# Altium PCB leddriver.PcbDoc
Units mm, origin at the board's own origin, x right, y up, seen from the top; angles counter-clockwise.
Board outline 133.49 x 91.8 mm, 2 copper layers (Top Layer, Bottom Layer), stack 1.58 mm thick; 91 components, 61 nets, 320 pads, 24 vias.
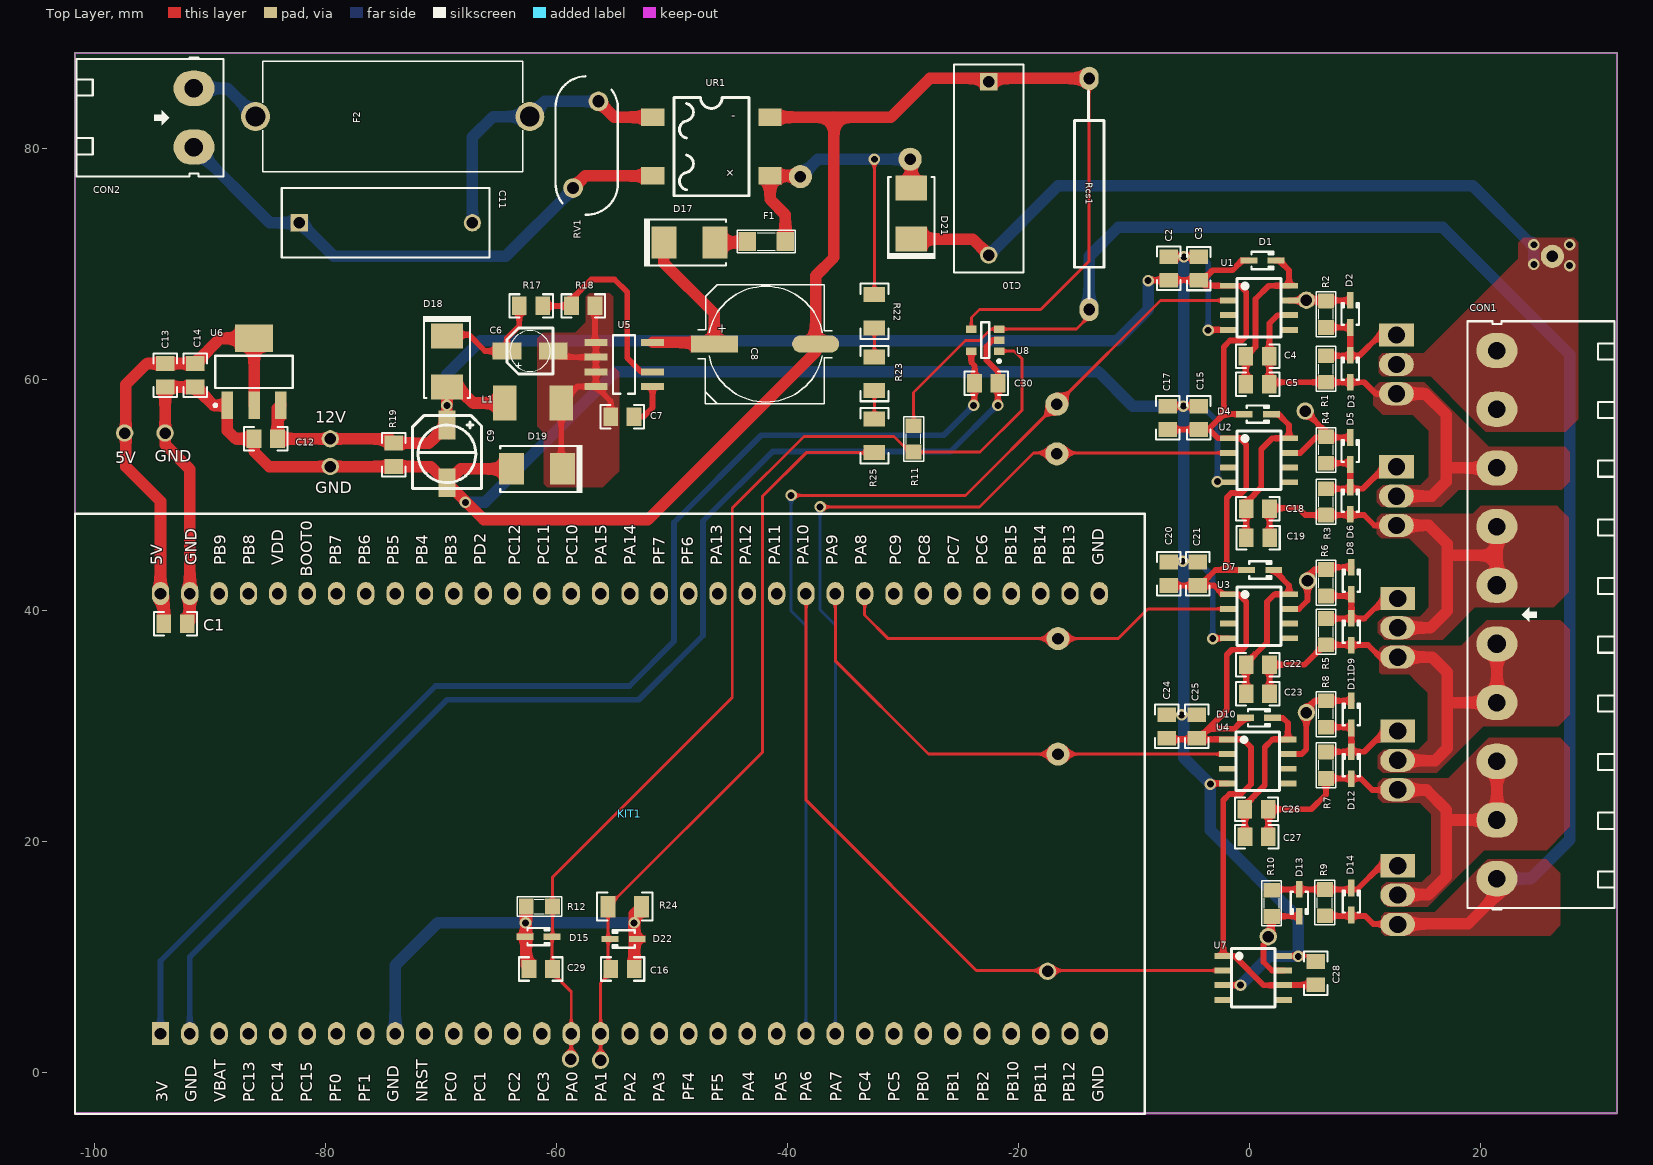
[diagram p0: Top Layer view]
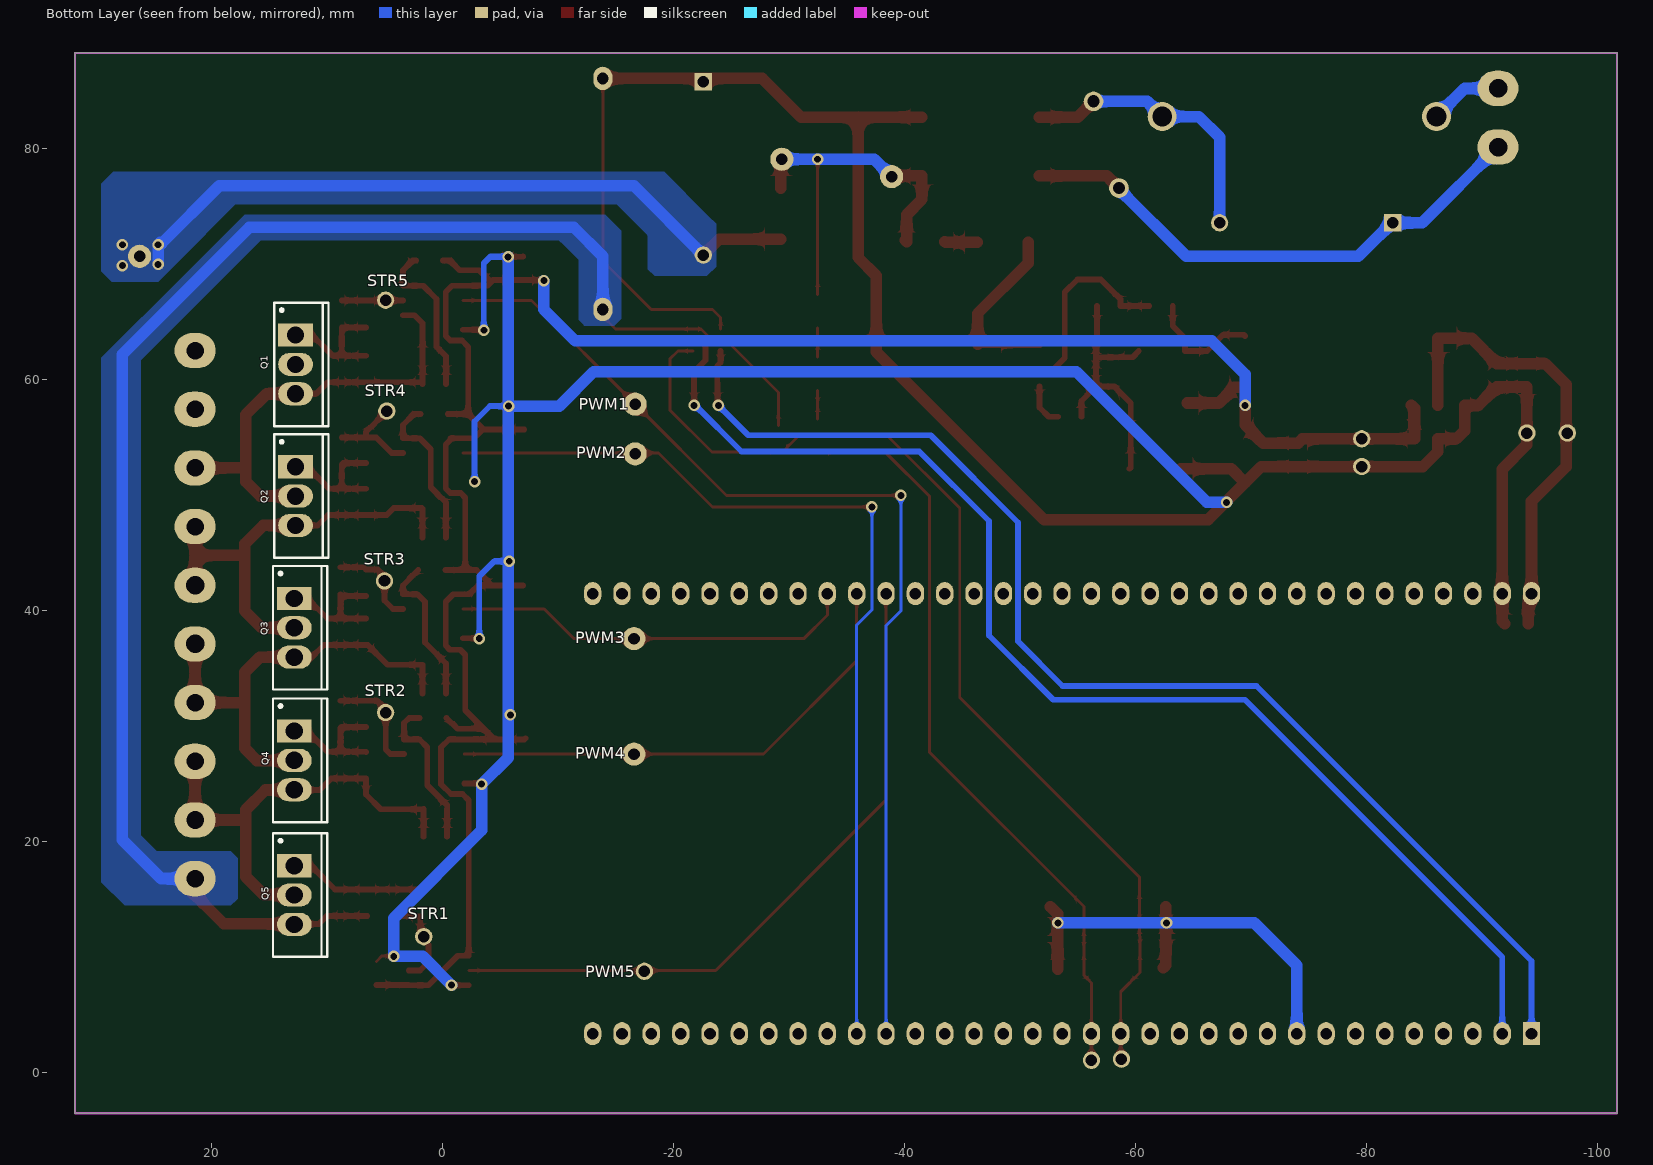
[diagram p1: Bottom Layer view, seen from below]

## Layer stack, top to bottom
Top Solder: solder mask 0.0102, Solder Resist, Dk 3.5
Top Layer: signal copper 0.0356
Dielectric 1: dielectric 1.5086, FR-4, Dk 4.8
Bottom Layer: signal copper 0.0356
Bottom Solder: solder mask 0.0102, Solder Resist, Dk 3.5

## Board outline
-101.7,-3.5 31.794,-3.5 31.794,88.3 -101.7,88.3

## Design rules (kind name [scope] priority, off if disabled: settings)
Clearance Clearance_1 [InNet('GND')] p1: gap=0.254
Clearance cutout [IsRegion] p2: gap=0.2
Clearance keepout [OnLayer('Keep-Out Layer')] p3: gap=0.2
Clearance [All] p4: gap=0.254
HoleSize [All] p1: absolutevalues=TRUE maxlimit=5 minlimit=0.01 maxpercent=80.000 minpercent=20.000
MinimumSolderMaskSliver [All] p1: minsoldermaskwidth=0.01
PolygonConnect [All] p1: connectstyle=Direct reliefconductorwidth=0.254 reliefentries=4 polygonreliefangle="90 Angle" airgapwidth=0.254
RoutingVias [All] p1: holewidth=0.3 width=0.6 viastyle="Through Hole" minholewidth=0.3 minwidth=0.6 maxholewidth=5 maxwidth=5
SilkToSilkClearance [All] p1: silktosilkclearance=0.1
SilkToSolderMaskClearance [IsPad] p1: minsilkscreentomaskgap=0.01 clearancetoexposedcopper=TRUE
SolderMaskExpansion [All] p1: expansion=0.102
Width [All] p1: maxlimit=5 minlimit=0.254 preferedwidth=0.254
26 further rules are at their usual default settings.

## Components (designator, comment, footprint, x,y, rotation, side; value= is the part's Value field where it differs from the comment)
C1 "104" 0805_HV -93,38.9 r180 top
C2 "106" 0805_HV -7,69.656 r270 top
C3 "104" 0805_HV -4.4,69.64 r270 top
C4 "106" 0805_HV 0.684,62.04 r180 top
C5 "104" 0805_HV 0.684,59.64 r180 top
C6 "10uF" TU_NHOM_10uF_MH -62.3,62.5 r270 top
C7 "104" 0805_HV -54.316,56.8 r0 top
C8 "400AX6R8M8x11" CAP-PANACAP-G-GENERIC -41.9,63.1 r0 top
C9 "220uF" TU_NHOM_2.5_MH -69.5,53.6 r0 top
C10 "B32922C3334M189" B32922_12mm -22.6,78.3 r270 top
C11 "B32922C3334M189" B32922_12mm -74.8,73.6 r0 top
C12 "105" 0805_HV -85.184,54.9 r0 top
C13 "105" 0805_HV -93.9,60.4 r90 top
C14 "105" 0805_HV -91.3,60.4 r90 top
C15 "106" 0805_HV -4.4,56.716 r270 top
C16 "104" 0805_HV -54.3,9 r180 top
C17 "104" 0805_HV -7.1,56.716 r270 top
C18 "106" 0805_HV 0.7,48.84 r180 top
C19 "104" 0805_HV 0.716,46.34 r180 top
C20 "106" 0805_HV -7,43.216 r270 top
C21 "104" 0805_HV -4.5,43.216 r270 top
C22 "106" 0805_HV 0.7,35.34 r180 top
C23 "104" 0805_HV 0.7,32.84 r180 top
C24 "106" 0805_HV -7.2,30 r270 top
C25 "104" 0805_HV -4.6,30 r270 top
C26 "106" 0805_HV 0.584,22.84 r180 top
C27 "104" 0805_HV 0.6,20.44 r180 top
C28 "104" 0805_HV 5.7,8.64 r270 top
C29 "104" 0805_HV -61.384,9 r0 top
C30 "104" 0805_HV -22.816,59.7 r180 top
CON1 "CON 10 EDG 5.08_MH" "Con 10 EDG 5.08" 21.4,39.68 r90 top
CON2 "CON 2 EDG 5.08_MH" "CON 2 EDG 5.08" -91.4,82.7 r270 top
D1 "BAT54HT1G" SOD-323 1.1,70.34 r180 top
D2 "BAT54HT1G" SOD-323 8.7,65.715 r270 top
D3 "15V" SOD-323 8.7,60.965 r270 top
D4 "BAT54HT1G" SOD-323 0.7,57.04 r180 top
D5 "BAT54HT1G" SOD-323 8.7,53.84 r270 top
D6 "15V" SOD-323 8.7,49.54 r270 top
D7 "BAT54HT1G" SOD-323 0.9,43.54 r180 top
D8 "BAT54HT1G" SOD-323 8.8,42.615 r270 top
D9 "15V" SOD-323 8.8,38.2 r270 top
D10 "BAT54HT1G" SOD-323 0.8,30.74 r180 top
D11 "BAT54HT1G" SOD-323 8.8,31.04 r270 top
D12 "15V" SOD-323 8.8,26.64 r270 top
D13 "BAT54HT1G" SOD-323 4.3,14.74 r90 top
D14 "15V" SOD-323 8.8,14.84 r270 top
D15 "3.3V" SOD-323 -61.575,11.8 r180 top
D17 "US1M-13-F" SMB -48.51,71.9 r180 top
D18 "US1M-13-F" SMB -69.5,61.59 r90 top
D19 "US1M-13-F" SMB -61.71,52.3 r0 top
D21 "US1M-13-F" SMB -29.3,74.4 r270 top
D22 "3.3V" SOD-323 -54.2,11.6 r0 top
F1 "FUSE_AUTO_0.5A 8V 1206_MH" "FUSE 1206" -41.8,72 r180 top
F2 "37015000430" "Fuse 5x20" -74.2,82.8 r180 top
KIT1 "STM32discovery" STM32discovery_kit -53.66,22.45 r0 top locked
L1 "680uF" "Inductor 4.5x5" -61.8,58.1 r0 top
Q1 "IPA60R330P" TO-220AB_NH 12.7,61.34 r270 bottom
Q2 "IPA60R330P" TO-220AB_NH 12.7,49.94 r270 bottom
Q3 "IPA60R330P" TO-220AB_NH 12.8,38.54 r270 bottom
Q4 "IPA60R330P" TO-220AB_NH 12.8,27.06 r270 bottom
Q5 "IPA60R330P" TO-220AB_NH 12.8,15.4 r270 bottom
R1 "10k" "Tro SMD 0805" 6.6,60.94 r270 top
R2 "10" "Tro SMD 0805" 6.6,65.683 r90 top
R3 "10k" "Tro SMD 0805" 6.6,49.44 r270 top
R4 "10" "Tro SMD 0805" 6.6,53.94 r90 top
R5 "10k" "Tro SMD 0805" 6.6,38.2 r270 top
R6 "10" "Tro SMD 0805" 6.6,42.44 r90 top
R7 "10k" "Tro SMD 0805" 6.6,26.64 r270 top
R8 "10" "Tro SMD 0805" 6.6,31.083 r90 top
R9 "10k" "Tro SMD 0805" 6.5,14.74 r270 top
R10 "10" "Tro SMD 0805" 1.9,14.683 r270 top
R11 "10k" "Tro SMD 0805" -29.1,54.9 r90 top
R12 "100k" "Tro SMD 0805" -61.5,14.4 r180 top
R17 "13k" 0805_HV -62.216,66.4 r180 top
R18 "2K" 0805_HV -57.7,66.4 r180 top
R19 "3k3" 0805_HV -74.1,53.516 r90 top
R22 "1M" 1206 -32.5,65.95 r270 top
R23 "100K" 1206 -32.5,60.55 r90 top
R24 "100K" 1206 -54.1,14.4 r180 top
R25 "1M" 1206 -32.5,55.15 r270 top
Rcs1 "10R" TRO_VACH_2W -13.9,76.1 r270 top
RV1 "S10K275E2" VAR_S10K275E2 -57.4,80.3 r270 top
U1 "FAN73611MX" "SOP 8" 0.8,66.24 r270 top
U2 "FAN73611MX" "SOP 8" 0.8,53.04 r270 top
U3 "FAN73611MX" "SOP 8" 0.8,39.54 r270 top
U4 "FAN73611MX" "SOP 8" 0.696,26.975 r270 top
U5 "LNK306" "SOP 7" -51.7,59.43 r180 top
U6 "AMS1117-3.3V SOT223 _MH" SOT223 -86.2,60.7 r0 top
U7 "PM8834TR" "SOP 8" 0.303,8.235 r270 top
U8 "INA180" SOT23-5AL -22.9,63.45 r180 top
UR1 "DB207S" DB207S -46.6,80.2 r270 top

## Footprints (in the part's own frame and the unit in brackets; to place one, negate y for a bottom-side part, rotate by r counter-clockwise, add the part's x,y. Pads: shape width x height; smd on the part's side, far side on the other; paste and mask are expansions set on the pad)
0805_HV [mil] "0805 with 30mil clearance between pads"
  rect 50x63 smd: 1(-40,0) 2(40,0)
  silkscreen extent -74,-40 74,40, body extent -43,-29 43,29, height 57
1206 [mm] "1206 from SM-752 data"
  rect 1.3x1.85 smd: 1(1.45,0) 2(-1.45,0)
  silkscreen extent -2.4,-1.21 2.4,1.21, body extent -1.7,-0.9 1.7,0.9, height 1.35
B32922_12mm [mm] "Epcos film capacitors, 15mm spacing"
  rect 1.5x1.5 hole 0.991: 1(-7.5,0)
  round 1.5 hole 0.991: 2(7.5,0)
  silkscreen extent -9,-3 9,3, body extent -9,-3 9,3, height 12
CAP-PANACAP-G-GENERIC [mil] "0805 with 30mil clearance between pads"
  rect 160x59.06 smd: 1(-175,0)
  oval 160x59.06 smd: 2(170,0)
  silkscreen extent -231,-203 227,203, body extent -233,-203 223,203, height 402
"CON 2 EDG 5.08" [mil]
  oval 120x140 hole 62.99: 1(-100,0) 2(100,0)
  silkscreen extent -205,-400 200,100, body extent -197,-399 197,73, height 334
"Con 10 EDG 5.08" [mil]
  oval 120x140 hole 60: 1(-900,0) 2(-700,0) 3(-500,0) 4(-300,0) 7(300,0) 8(500,0) 9(700,0) 10(900,0)
  oval 120x140 hole 62.99: 5(-100,0) 6(100,0)
  silkscreen extent -1005,-400 1000,100, body extent -996,-402 997,70, height 334
DB207S [mm]
  rect 1.5x2 smd: 1(-2.54,-5.08) 2(2.54,-5.08) 3(2.54,5.08) 4(-2.54,5.08)
  silkscreen extent -4.25,-3.25 4.26,3.25, body extent -4.4,-4.98 4.4,4.98, height 3.02
"Fuse 5x20" [mm] "Epcos film capacitors, 15mm spacing"
  round 2.5 hole 1.7: 1(-11.875,0) 2(11.875,0)
  silkscreen extent -11.25,-4.8 11.25,4.8, body extent -12.14,-4.46 12.11,4.54, height 13.94
"FUSE 1206" [mil]
  rect 60x65 smd: 1(-63,0.94) 2(67,0.94)
  silkscreen extent -97,-37 101,40, body extent -63,-33 63,33, height 22
"Inductor 4.5x5" [mm]
  rect 2x3 smd: 1(2.2,-0.1) 2(-2.7,-0.1)
  body extent -2.6,-2.6 2.2,2.2, height 2
SMB [mm] "Molded Diode, 2-Leads, Body 5.4x3.6mm, IPC Medium Density, based on OnSemi component dimensions"
  rect 2.159x2.743 smd: 1(2.21,0) 2(-2.21,0)
  silkscreen extent -3.18,-2.08 3.94,2.08, body extent -2.7,-1.8 2.7,1.8, height 2.32
SOD-323 [mm] "SOD-323/SC-76; 2 Leads; Body 1.7 x 1.3 mm, (LxW)"
  rect 1.45x0.55 smd: 1(-1.175,0) 2(1.175,0)
  silkscreen extent -0.95,-0.75 0.95,0.75
"SOP 7" [mm] "LQFP64"
  rect 2x0.6 smd: 1(0,0) 2(0,-1.27) 4(0,-3.81) 5(4.9,-3.81) 6(4.9,-2.54) 7(4.9,-1.27) 8(4.9,0)
  silkscreen extent 1.52,-4.44 3.43,0.64, body extent -0.66,-4.38 5.39,0.52, height 1.36
"SOP 8" [mil] "LQFP64"
  rect 20x60 smd: 1(-75,-102.5) 2(-25,-102.5) 3(25,-102.5) 4(75,-102.5) 5(75,102.5) 6(25,102.5) 7(-25,102.5) 8(-75,102.5)
  silkscreen extent -100,-75 100,75, body extent -98,-120 100,117, height 63
SOT23-5AL [mm] "SOT23, 5-Leads, Body 2.9x1.6mm, Pitch 0.95mm, Lead Span 2.8mm, IPC High Density"
  rect 0.9x0.65 smd: 1(-1.2,0.95) 2(-1.2,0) 3(-1.2,-0.95) 4(1.2,-0.95) 5(1.2,0.95)
  silkscreen extent -1.33,-1.55 0.35,1.95, body extent -0.9,-1.55 0.9,1.55, height 1.45
SOT223 [mm]
  rect 1x2.4 smd: 1(-2.3,-2.9) 2(0,-2.9) 3(2.3,-2.9)
  rect 3.3x2.4 smd: 4(0,2.9)
  silkscreen extent -3.47,-3.02 3.35,1.4, body extent -3.25,-3.56 3.25,3.4, height 1.68
STM32discovery_kit [mm]
  rect 1.5x2 hole 1 paste+0: 1(-40.64,-19.05)
  oval 1.5x2 hole 1 paste+0: 2(-38.1,-19.05) 3(-35.56,-19.05) 4(-33.02,-19.05) 5(-30.48,-19.05) 6(-27.94,-19.05) 7(-25.4,-19.05) 8(-22.86,-19.05) 9(-20.32,-19.05) 10(-17.78,-19.05) 11(-15.24,-19.05) 12(-12.7,-19.05) 13(-10.16,-19.05) 14(-7.62,-19.05) 15(-5.08,-19.05) 16(-2.54,-19.05) 17(0,-19.05) 18(2.54,-19.05) 19(5.08,-19.05) 20(7.62,-19.05) 21(10.16,-19.05) 22(12.7,-19.05) 23(15.24,-19.05) 24(17.78,-19.05) 25(20.32,-19.05) 26(22.86,-19.05) 27(25.4,-19.05) 28(27.94,-19.05) 29(30.48,-19.05) 30(33.02,-19.05) 31(35.56,-19.05) 32(38.1,-19.05) 33(40.64,-19.05) 34(40.64,19.05) 35(38.1,19.05) 36(35.56,19.05) 37(33.02,19.05) 38(30.48,19.05) 39(27.94,19.05) 40(25.4,19.05) 41(22.86,19.05) 42(20.32,19.05) 43(17.78,19.05) 44(15.24,19.05) 45(12.7,19.05) 46(10.16,19.05) 47(7.62,19.05) 48(5.08,19.05) 49(2.54,19.05) 50(0,19.05) 51(-2.54,19.05) 52(-5.08,19.05) 53(-7.62,19.05) 54(-10.16,19.05) 55(-12.7,19.05) 56(-15.24,19.05) 57(-17.78,19.05) 58(-20.32,19.05) 59(-22.86,19.05) 60(-25.4,19.05) 61(-27.94,19.05) 62(-30.48,19.05) 63(-33.02,19.05) 64(-35.56,19.05) 65(-38.1,19.05) 66(-40.64,19.05)
  silkscreen extent -48.04,-26 44.56,25.95
TO-220AB_NH [mm] "TO, Thru-Hole, Vertical, Heatsink Mounted; 3 In-Line Leads; Pitch 2.54 mm"
  rect 2x3 hole 1.5 paste+0: 1(-2.54,0)
  oval 2x3 hole 1.5 paste+0: 2(0,0) 3(2.54,0)
  silkscreen extent -5.35,-1.85 5.35,2.85, body extent -5.08,-1.57 5.08,3, height 20.54
"Tro SMD 0805" [mil]
  rect 50x55 smd: 1(-45,0) 2(45,0)
  silkscreen extent -77,-34 76,33, body extent -62,-28 56,27, height 21
TRO_VACH_2W [mil]
  oval 80x65 hole 40: 1(-393.7,0) 2(393.7,0)
  silkscreen extent -351,-50 354,50, body extent -414,-110 414,107, height 217
TU_NHOM_2.5_MH [mm] "0805 with 30mil clearance between pads"
  rect 1.5x2.5 smd: 1(0,2.5) 2(0,-2.5)
  silkscreen extent -3,-3 3,3.3, body extent -3.3,-3.5 3.3,3.5, height 8.11
TU_NHOM_10uF_MH [mm] "0805 with 30mil clearance between pads"
  rect 1.5x2.5 smd: 1(0,-2) 2(0,2)
  silkscreen extent -2,-2 2,2, body extent -2.15,-2.5 2.15,2.5, height 5.4
VAR_S10K275E2 [mm] "EPCOS"
  round 1.7 hole 1.067: 1(-3.81,1.016) 2(3.69,-1.184)
  silkscreen extent -6,-2.7 6,2.7, body extent -5.98,-2.7 5.98,2.7, height 14.99

## Part data
C1 C2 C3 C4 C5 C7 C12 C13 C14 C15 C16 C17 C18 C19 C20 C21 C22 C23 C24 C25 C26 C27 C28 C29 C30: library part CM, "Cap SMD"
C6: library part TU_NHOM_10uF_25V_MH, "TU_NHOM_10uF_25V_MH"
C8: "CAP, AL, 6.8uF, 400V, +/-20%, TH"
C9: library part TU_NHOM_220uF_25V_MH, "TU_NHOM_220uF_25V_MH"
C10 C11: library part BFC233620154, "CAP FILM 0.33UF 630VDC RADIAL"
CON1: "CON 10 EDG 5.08 (xanh cong)"
CON2: "CON 2 EDG 5.08 (xanh cong)"
D1 D2 D3 D4 D5 D6 D7 D8 D9 D10 D11 D12 D13 D14 D15 D22: library part MMDL914-TP, "Diode, Switching, 100 V, 0.2 A, SOD-323"
D17 D18 D19 D21: library part MURS160-13-F, "Diode, Ultrafast, 600V, 1A, SMB"
F1: "Fuse"
F2: library part 0216008.MXESPP, "FUSE BOARD MOUNT 5A 250VAC RAD"
KIT1: library part STM32Discovery_kit
L1: library part "Inductor 4.5x5_MH"
Q1 Q2 Q3 Q4 Q5: library part IPP60R190P6, "MOSFET N-CH 600V 10.6A TO220"
R1 R2 R3 R4 R5 R6 R7 R8 R9 R10 R11 R12 R22 R23 R24 R25: library part "R nho", "RES, 100, 1%, 0.1 W, 0402"
R17 R18 R19: library part R, "Resistor 1/4W"
Rcs1: library part TRO_CS_2W_MH
RV1: "Varistor 275V RMS 10MM Radial, TH"
U5: library part Component_1
U8: "Micropower Quad CMOS Voltage Comparator"

## Free pads (board coordinates)
  round 2 hole 1 paste+0: 0(-16.7,57.9) 0(26.2,70.7) 1(-38.9,77.6) 1(-16.7,53.6) 2(-29.4,79.1) 2(-16.6,37.6) 3(-16.6,27.6)
  round 1.5 hole 1 paste+0: 4(4.9,66.9) 5(4.8,57.3) 6(5,42.6) 7(4.9,31.2) 8(1.6,11.8) 9(-58.8,1.2) 10(-56.2,1.1) 11(-79.6,54.9) 12(-79.6,52.5) 13(-97.4,55.4) 14(-93.9,55.4) 15(-17.5,8.8)

## Via types
v1: diameter 1, hole 0.6, Top Layer to Bottom Layer, tented both sides, 24 vias

## Nets (pads, with @x,y where several pads share a name; then routed paths per layer and width w, separated by ;. In a path a pad name is that pad's centre, name@x,y a point inside that pad or via, vN(x,y) a via of type N, cw(c..) or ccw(c..) an arc to the next point about the centre after c; other vN are vias at no path point)
3.3V: C30.2 KIT1.1 U8.5 | length 107.5
  Top Layer w0.5: U8.5 -24.1,61.5 -23.8,61.2 -23.8,59.732 C30.2 -23.832,57.868 v1(-23.9,57.8)
  Bottom Layer w0.5: KIT1.1 -94.3,9.7 -70.5,33.5 -53.7,33.5 -49.834,37.366 -49.834,47.666 -42.3,55.2 -26.5,55.2 v1(-23.9,57.8)
5V: C1.2 C13.2 C14.2 KIT1.66 pad.13 U6.2 U6.4 | length 40.6
  Top Layer w1: C1.2 -94.016,41.216 KIT1.66 -94.3,49.5 -97.3,52.5 -97.3,59.6 -95.484,61.416 C13.2 C14.2 -89.116,63.6 U6.4 U6.2
12V: C2.2 C3.2 C9.1 C12.2 C15.2 C17.2 C20.2 C21.2 C24.2 C25.2 C28.2 D1.2 D4.2 D7.2 D10.2 D18.2 L1.2 pad.11 R19.2 U1.1 U2.1 U3.1 U4.1 U6.3 U7.1 U7.6 | length 213.7
  Top Layer w0.5: C12.2 -83.9,55.168 U6.3 ; v1(-8.8,68.6) -8.76,68.64 C2.2 -4.416,68.64 C3.2 ; C24.2 -7.096,28.88 U4.1 -0.58,28.88 0.1,28.2 0.1,25 -0.756,24.144 -1.756,24.144 -2.3,23.6 U7.1 -1.34,10.14 1.2,7.6 U7.6 2.931,7.624 C28.2 ; C17.2 C15.2 C15.2@-3.6,55.7 ; C20.2 C21.2 C21.2@-4.3,42.2 ; C25.2 -4.416,28.984 -3.6,29.8 ; D4.2 -2.26,57.04 ; D10.2 -1.315,29.8 -3.6,29.8 ; D7.2 -2,43.54 ; D1.2 -0.66,70.34 -1.5,69.5 -3.2,69.5 -4.076,68.624 C3.2 ; C3.2 -3.921,68.145 U1.1 -0.845,68.145 -0.3,67.6 -0.3,63.8 -0.7,63.4 -1.7,63.4 -2.26,62.84 -2.26,57.04 ; C21.2@-4.3,42.2 -2.96,43.54 -2,43.54 ; C21.2@-4.3,42.2 -3.1,42.2 -2.345,41.445 U3.1 -0.945,41.445 -0.3,40.8 -0.3,37 -0.656,36.644 -1.556,36.644 -2,36.2 -2,31.4 -3.6,29.8 ; C15.2@-3.6,55.7 -2.26,57.04 ; C15.2@-3.6,55.7 -3.5,55.7 -2.745,54.945 U2.1 -0.745,54.945 -0.7,54.9 -0.7,54.8 -0.3,54.4 -0.3,50.6 -0.7,50.2 -1.6,50.2 -2,49.8 -2,43.54
  Top Layer w1: U6.3 -84.168,57.532 C12.2 -74.468,54.9 R19.2 -71.068,54.532 C9.1 v1(-69.5,57.8) D18.2 -68.58,59.38 -67.2,58 L1.2
  Bottom Layer w1: v1(-69.5,57.8) -69.5,60.5 -66.6,63.4 -11.5,63.4 -8.8,66.1 v1(-8.8,68.6)
+VDC: C10.2 CON1.9 CON1.10 D21.1 pad.0@26.2,70.7 Q1.2 | length 60.9
  Top Layer w1: D21.1 -23.99,72.19 C10.2
  Bottom Layer w1: C10.2 -16.6,76.8 19.3,76.8 24.3,71.8 24.4,71.9 v1(24.6,71.7) v1(24.6,70)
  other v1: 27.7,69.9 27.7,71.7
+VDC1: C8.1 D17.1 U5.4 | length 16
  Top Layer w1: U5.4 -46.485,63.24 C8.1 -46.345,65.745 -50.72,70.12 D17.1
BP: C7.2 U5.1 | length 3.8
  Top Layer w0.5: C7.2 -52.5,56.8 -51.7,57.6 U5.1
CS: CON1.1 D14.2 Q5.3 R9.2 R11.2 Rcs1.2 U8.3 | length 140.5
  Top Layer w0.254: R11.2 -29.1,58.9 -24.6,63.4 -23.4,63.4 -22.4,64.4 U8.3 -15,64.4 -13.9,65.5 Rcs1.2
  Top Layer w0.5: R9.2 10.003,13.597 10.7,12.9 Q5.3@13,12.9
  Top Layer w1: Q5.3@13,12.9 18.9,12.9 21.4,15.4 CON1.1
  Bottom Layer w1: Rcs1.2 -13.9,70.7 -11.4,73.2 16.7,73.2 27.7,62.2 27.7,20.2 24.32,16.82 CON1.1
FB: R17.1 R18.2 U5.2 | length 17.4
  Top Layer w0.5: R17.1 R18.2 -58.716,66.984 -57,68.7 -55,68.7 -53.9,67.6 -53.9,61.9 -52.7,60.7 U5.2
GND: C1.1 C2.1 C3.1 C8.2 C9.2 C10.1 C12.1 C13.1 C14.1 C15.1 C17.1 C20.1 C21.1 C24.1 C25.1 C28.1 D19.2 KIT1.65 pad.12 pad.14 R19.1 Rcs1.1 U1.4 U2.4 U3.4 U4.4 U6.1 U7.3 U7.8 U8.4 UR1.4 | length 380.8
  Top Layer w0.254: U8.4 -24.1,65.4 -23.4,66.1 -18.1,66.1 -13.9,70.3 Rcs1.1 ; U7.8 5.216,10.14 C28.1
  Top Layer w0.5: C17.1 v1(-5.75,57.732) C15.1 ; C2.1 -6.984,70.656 v1(-5.7,70.656) C3.1 ; v1(-3.6,64.3) -3.565,64.335 U1.4 ; v1(-3.4,25) -3.33,25.07 U4.4 ; v1(-3.2,37.6) -3.165,37.635 U3.4 ; U7.3 v1(-0.8,7.6)
  Top Layer w1: C1.1 -91.76,39.124 KIT1.65 -91.76,52.26 -93.9,54.4 C13.1 C14.1 -89.716,57.8 U6.1 -88.5,55.6 -87.8,54.9 C12.1 -86.2,53.8 -84.9,52.5 pad.12 R19.1 -70.9,52.5 C9.2 ; D19.2 -68.3,52.3 C9.2 ; UR1.4 -36,82.74 ; Rcs1.1@-14,86.1 -27.7,86.1 -31.06,82.74 -36,82.74 ; C9.2 -66.3,47.9 -52.1,47.9 -37.582,62.418 C8.2 -37.582,69.018 -36,70.6 -36,82.74
  Bottom Layer w0.5: v1(-5.9,31) -5.9,44.2 v1(-5.8,44.3) v1@-5.8,57.682 ; v1@-5.7,44.3 -4.5,44.3 -3.2,43 v1(-3.2,37.6) ; v1@-5.7,57.732 -4.132,57.732 -2.8,56.4 v1(-2.8,51.2) ; v1(-5.7,70.656) -4.244,70.656 -4.2,70.7 -3.6,70.1 v1(-3.6,64.3)
  Bottom Layer w1: v1(-67.9,49.4) -66.2,49.4 -54.9,60.7 -13.1,60.7 -10.132,57.732 v1(-5.75,57.732) ; v1(-5.7,70.656) -5.7,57.732 -5.7,44.3 -5.7,27.3 v1(-3.4,25) -3.4,21 4.2,13.4 v1(4.2,10.1) 1.7,10.1 v1(-0.8,7.6)
GND1: C16.1 C29.1 D15.2 D22.2 KIT1.9 R12.2 R24.2 | length 39.2
  Top Layer w1: R12.2 -62.643,9.327 C29.1@-62.416,9.1 ; C16.1 -53.284,13.766 R24.2
  Bottom Layer w1: KIT1.9 -73.98,9.32 -70.3,13 v1(-62.7,13) v1(-53.3,13)
GND_INA: C30.1 KIT1.2 U8.2 | length 108.8
  Top Layer w0.5: v1@-21.8,58 C30.1 -21.8,60.7 -22.8,61.7 -22.8,62.9 -22.25,63.45 U8.2
  Bottom Layer w0.5: KIT1.2 -91.76,10.04 -69.5,32.3 -52.9,32.3 -47.326,37.874 -47.326,47.774 -41.3,53.8 -25.9,53.8 -21.9,57.8 v1(-21.8,57.8)
HV1: D21.2 F1.1 pad.1@-38.9,77.6 pad.2@-29.4,79.1 R22.2 UR1.3 | length 33.4
  Top Layer w0.254: R22.2 v1(-32.5,79.1)
  Top Layer w1: F1.1@-40.076,72.1 F1.1 -40.2,74.3 -41.52,75.62 UR1.3 -38.96,77.66 pad.1@-38.9,77.6 ; pad.2@-29.4,79.1 -29.3,79 D21.2
  Bottom Layer w1: pad.1@-38.9,77.6 -37.4,79.1 v1(-32.5,79.1) pad.2@-29.4,79.1
IN0: C29.2 D15.1 KIT1.15 pad.9 R11.1 R12.1 U8.1 | length 91.3
  Top Layer w0.254: pad.9 -58.74,1.26 KIT1.15 -58.74,7.04 -60.4,8.7 D15.1 -60.357,11.843 R12.1 -60.357,16.943 -44.8,32.5 -44.8,48.9 -38.6,55.1 -30.8,55.1 -29.457,53.757 R11.1 -23.343,53.757 -19.7,57.4 -19.7,61.8 -20.4,62.5 U8.1
IN1: C16.2 D22.1 KIT1.16 pad.10 R24.1 R25.1 | length 65.9
  Top Layer w0.254: pad.10 KIT1.16 -56.2,7.8 -55.55,8.45 R24.1 -42.2,27.75 -42.2,49.9 -38.4,53.7 R25.1
LED_PWM1: KIT1.23 pad.0@-16.7,57.9 U1.2 | length 92
  Top Layer w0.254: v1(-39.7,50) -24.6,50 -16.7,57.9 -7.725,66.875 U1.2
  Bottom Layer w0.254: v1(-39.7,50) -39.7,40 -38.42,38.72 KIT1.23
LED_PWM2: KIT1.24 pad.1@-16.7,53.6 U2.2 | length 83.5
  Top Layer w0.254: v1(-37.2,49) -23.4,49 -18.725,53.675 U2.2
  Bottom Layer w0.254: v1(-37.2,49) -37.2,40.1 -35.88,38.78 KIT1.24
LED_PWM3: KIT1.42 pad.2@-16.6,37.6 U3.2 | length 35.3
  Top Layer w0.254: KIT1.42 -33.34,39.64 -31.3,37.6 -16.6,37.6 -11.4,37.6 -8.825,40.175 U3.2
LED_PWM4: KIT1.43 pad.3 U4.2 | length 43.1
  Top Layer w0.254: KIT1.43 -35.88,35.68 -27.81,27.61 U4.2
LED_PWM5: KIT1.44 pad.15 U7.2 | length 60.1
  Top Layer w0.254: KIT1.44 -38.4,41.48 -38.4,23.6 -23.67,8.87 U7.2
LED_STR2: C26.1 C27.1 CON1.2 CON1.3 D12.2 Q4.3 Q5.2 R7.2 | length 40.8
  Top Layer w0.5: C26.1 C26.1@1.616,22.824 ; C27.1 C26.1@1.616,22.824 ; Q4.3@12.9,24.5 10.6,24.5 9.603,25.497 R7.2 6.6,24.1 5.324,22.824 C26.1@1.616,22.824
  Top Layer w1: Q4.3@12.9,24.5 15.3,24.5 17,22.8 17,21.9 ; Q5.2@13,15.44 15.44,15.44 17,17 17,21.9 ; CON1.3 CON1.2 17,21.9
LED_STR3: C22.1 C23.1 CON1.4 CON1.5 D9.2 Q3.3 Q4.2 R5.2 | length 40.2
  Top Layer w0.5: C23.1 C22.1 4.74,35.34 6.457,37.057 R5.2 10.243,37.057 11.3,36 Q3.3
  Top Layer w1: Q3.3 15.8,36 17.1,34.7 17.1,32 ; Q4.2@12.9,27.04 16.04,27.04 17.1,28.1 17.1,32 ; CON1.5 CON1.4 17.16,32.06 17.1,32
LED_STR4: C18.1 C19.1 CON1.6 CON1.7 D6.2 Q2.3 Q3.2 R3.2 | length 39.4
  Top Layer w0.5: C19.1 1.716,46.356 C18.1 1.776,48.9 4.2,48.9 4.803,48.297 R3.2 6.603,48.3 9.9,48.3 10.8,47.4 Q2.3
  Top Layer w1: Q2.3 15.5,47.4 17.1,45.8 17.1,44.6 ; Q3.2 15.64,38.54 17.1,40 17.1,44.6 ; CON1.6 21.4,44.8 ; CON1.7 21.4,44.8 ; 17.1,44.6 17.3,44.8 21.4,44.8
LED_STR5: C4.1 C5.1 CON1.8 D3.2 Q1.3 Q2.2 R1.2 U1.6 | length 38.9
  Top Layer w0.5: U1.6 2.405,65.605 1.7,64.9 C4.1 C5.1 1.857,59.797 R1.2 9.903,59.797 10.9,58.8 Q1.3
  Top Layer w1: Q2.2 15.74,49.94 17,51.2 17,52.5 ; Q1.3 15.2,58.8 17,57 17,52.5 ; CON1.8 17.12,52.38 17,52.5
NetC4_2: C4.2 C5.2 D1.1 U1.8 | length 13.9
  Top Layer w0.5: C5.2 C4.2 0.5,62.872 0.5,67 1.645,68.145 U1.8 3.403,69.497 2.56,70.34 D1.1
NetC6_1: C6.1 D18.1 R17.2 | length 10.2
  Top Layer w0.5: D18.1 -69.4,63.9 -67.6,63.9 -66.2,62.5 C6.1 -64.3,63.6 -63.232,64.668 R17.2
NetC11_1: C11.1 CON2.2 RV1.2 UR1.2 | length 46.6
  Top Layer w1: RV1.2 -57.534,77.66 UR1.2
  Bottom Layer w1: CON2.2 -84.84,73.6 C11.1 -82.2,73.6 -79.3,70.7 -64.4,70.7 -58.584,76.516 RV1.2
NetC11_2: C11.2 F2.1 RV1.1 UR1.1 | length 24.9
  Top Layer w1: RV1.1 -55.014,82.74 UR1.1
  Bottom Layer w1: C11.2 -67.3,81 -65.5,82.8 F2.1 -61.015,84.11 RV1.1
NetC18_2: C18.2 C19.2 D4.1 U2.8 | length 14.1
  Top Layer w0.5: C19.2 -0.316,46.356 C18.2 -0.316,49.384 1,50.7 1,54 1.945,54.945 U2.8 3.404,56.096 2.46,57.04 D4.1
NetC22_2: C22.2 C23.2 D7.1 U3.8 | length 13.5
  Top Layer w0.5: C23.2 C22.2 -0.316,35.456 1.5,37.272 1.5,40.8 2.145,41.445 U3.8 3.404,42.211 D7.1
NetC26_2: C26.2 C27.2 D10.1 U4.8 | length 13.7
  Top Layer w0.5: C27.2 -0.416,22.824 C26.2 -0.432,23.168 1.3,24.9 1.3,28.2 1.98,28.88 U4.8 3.3,30.3 2.86,30.74 D10.1
NetCON2_1: CON2.1 F2.2 | length 6.3
  Bottom Layer w1: CON2.1 -88.515,85.24 F2.2
NetD2_1: D2.1 pad.4 R2.2 U1.7 | length 5.3
  Top Layer w0.5: U1.7 8.685,66.875 D2.1
NetD2_2: D2.2 D3.1 Q1.1 R1.1 R2.1 | length 11.3
  Top Layer w0.5: R1.1 9.483,62.083 11.28,63.88 Q1.1 ; R2.1 D2.2 D3.1
NetD5_1: D5.1 pad.5 R4.2 U2.7 | length 8.8
  Top Layer w0.5: U2.7 4.375,53.675 5.715,55.015 D5.1 ; pad.5 6.6,55.5 R4.2
NetD5_2: D5.2 D6.1 Q2.1 R3.1 R4.1 | length 11
  Top Layer w0.5: R3.1 9.783,50.583 11.68,52.48 Q2.1 ; R4.1 8.568,52.797 D5.2 D6.1
NetD8_1: D8.1 pad.6 R6.2 U3.7 | length 8.1
  Top Layer w0.5: U3.7 4.275,40.175 5,40.9 pad.6 5,43 5.583,43.583 R6.2 6.807,43.79 D8.1
NetD8_2: D8.2 D9.1 Q3.1 R5.1 R6.1 | length 11.2
  Top Layer w0.5: R5.1 9.943,39.343 11.68,41.08 Q3.1 ; R6.1 8.657,41.297 D8.2 D9.1
NetD11_1: D11.1 pad.7 R8.2 U4.7 | length 9.5
  Top Layer w0.5: U4.7 4.51,27.61 4.9,28 pad.7 4.9,31.5 5.626,32.226 R8.2 8.789,32.226 D11.1
NetD11_2: D11.2 D12.1 Q4.1 R7.1 R8.1 | length 11.3
  Top Layer w0.5: R7.1 6.632,27.815 D12.1 ; R8.1 8.725,29.94 D11.2 D12.1 ; Q4.1@12.9,29.58 11.68,29.58 9.915,27.815 D12.1
NetD13_1: D13.1 pad.8 R10.2 U7.7 | length 8.6
  Top Layer w0.5: U7.7 1.93,8.87 1.2,9.6 1.2,11.1 1.9,11.8 R10.2 1.925,13.565 D13.1
NetD13_2: D13.2 D14.1 Q5.1 R9.1 R10.1 | length 12
  Top Layer w0.5: R10.1 1.957,15.883 R9.1 9.283,15.883 11.38,17.98 Q5.1@13,17.98
NetD17_2: D17.2 F1.2 | length 2.8
  Top Layer w1: D17.2 -43.578,71.9 F1.2
NetR22_1: R22.1 R23.1 | length 2.5
  Top Layer w0.254: R23.1 R22.1
NetR23_2: R23.2 R25.2 | length 2.5
  Top Layer w0.254: R25.2 R23.2
PA11: KIT1.45
PB0: KIT1.27
PB1: KIT1.28
PB3: KIT1.56
PB8: KIT1.63
PB9: KIT1.64
PB13: KIT1.35
PB14: KIT1.36
PB15: KIT1.37
PC13O: KIT1.4
PC14O: KIT1.5
PC15O: KIT1.6
PF0O: KIT1.7
PF1O: KIT1.8
PF4O: KIT1.19
PF5O: KIT1.20
S: C6.2 C7.1 D19.1 L1.1 R18.1 U5.5 U5.6 U5.7 U5.8 | length 23.4
  Top Layer w0.5: C6.2 -59.77,61.97 U5.6 ; D19.1 -59.6,52.4 L1.1 -58.17,59.43 U5.8 ; R18.1 -56.684,63.324 U5.5 U5.6 ; C7.1 -55.332,58.162 U5.8 ; U5.8 U5.7 U5.6
pads on no net: KIT1.3 KIT1.10 KIT1.11 KIT1.12 KIT1.13 KIT1.14 KIT1.17 KIT1.18 KIT1.21 KIT1.22 KIT1.25 KIT1.26 KIT1.29 KIT1.30 KIT1.31 KIT1.32 KIT1.33 KIT1.34 KIT1.38 KIT1.39 KIT1.40 KIT1.41 KIT1.46 KIT1.47 KIT1.48 KIT1.49 KIT1.50 KIT1.51 KIT1.52 KIT1.53 KIT1.54 KIT1.55 KIT1.57 KIT1.58 KIT1.59 KIT1.60 KIT1.61 KIT1.62 U1.3 U1.5 U2.3 U2.5 U2.6 U3.3 U3.5 U3.6 U4.3 U4.5 U4.6 U7.4 U7.5

## Polygon pours and split planes (outlines as drawn)
S on Top Layer "Bottom Layer-No Net" (solid, pour order 20): -57.5,67.2 -57.5,65.6 -57.5,65 -58.1,64.4 -58.4,64.1 -60.6,64.1 -61.2,64.1 -61.7,63.6 -61.7,62.3 -61.7,56 -61.5,55.8 -61.1,55.4 -61.1,52 -61.1,51 -60.8,50.7 -58.1,50.7 -56,50.7 -55.1,51.6 -54.6,52.1 -54.6,57.4 -54.6,60.7 -54.9,61 -55.1,61.2 -55.1,63.4 -55.1,67.2 -55.4,67.5 -57.2,67.5 -57.5,67.2
CS on Top Layer "Bottom Layer-No Net" (solid, pour order 18): 13.5,13.9 12.7,13.9 11.7,13.9 11.5,13.7 11.4,13.6 11.4,13.2 11.4,12.2 11.7,11.9 13.1,11.9 26,11.9 26.9,12.8 26.9,17.1 26.9,17.3 26.2,18 25.7,18.5 21.3,18.5 20.6,18.5 19.9,17.8 16,13.9 13.6,13.9
LED_STR2 on Top Layer "Bottom Layer-No Net" (solid, pour order 16): 13.1,25.5 11.5,25.5 11.3,25.3 11.1,25.1 11.1,24.7 11.1,23.8 11.3,23.6 11.5,23.4 12.9,23.4 14.7,23.4 15.5,22.6 15.7,22.4 15.7,19.5 15.7,17.3 15.2,16.8 14.9,16.5 13,16.5 11.8,16.5 11.4,16.1 11.4,15 11.4,14.9 11.7,14.6 11.9,14.4 12.9,14.4 15.4,14.4 17.1,16.1 20.3,19.3 22.6,19.3 25.7,19.3 27.4,21 27.7,21.3 27.7,28 27.7,28.2 27.1,28.8 26.9,29 23.3,29 20.7,29 20.1,28.4 17.2,25.5 13.1,25.5
LED_STR3 on Top Layer "Bottom Layer-No Net" (solid, pour order 14): 13.3,37 11.8,37 11.5,37 11.3,36.8 11.2,36.7 11.2,36.3 11.2,34.7 11.4,34.5 12.7,34.5 13.8,34.5 14.5,33.8 15.4,32.9 15.4,29.7 15.4,28.8 14.7,28.1 14.6,28 12,28 11.6,28 11.3,27.7 11.1,27.5 11.1,26.6 11.1,26.4 11.3,26.2 11.5,26 12.9,26 16.2,26 17.6,27.4 20.2,30 22.2,30 26.7,30 27.7,31 27.7,38.3 27.7,38.4 27.1,39 26.9,39.2 22.8,39.2 20.5,39.2 19.4,38.1 18.3,37
LED_STR4 on Top Layer "Bottom Layer-No Net" (solid, pour order 12): 13,48.4 11.4,48.4 11.1,48.1 11,48 11,47.7 11,46.7 11.4,46.3 13,46.3 13.8,46.3 15.3,44.8 15.5,44.6 15.5,42.2 15.5,40.3 15,39.8 14.7,39.5 13.3,39.5 11.6,39.5 11.1,39 11.1,38.5 11.1,38.1 11.5,37.7 11.7,37.5 12.8,37.5 16.7,37.5 17.8,38.6 19.5,40.3 21.5,40.3 26.3,40.3 27.1,41.1 27.6,41.6 27.6,46.4 27.6,48.1 26.9,48.8 26.6,49.1 22.3,49.1 20,49.1 19.5,48.6 19.3,48.4
LED_STR5 on Top Layer "Bottom Layer-No Net" (solid, pour order 10): 12.5,59.8 11.2,59.8 11,59.6 10.5,59.1 10.5,59 10.7,58.8 10.7,58.1 10.7,57.8 11,57.5 11.5,57 13.2,57 14.1,57 15.2,55.9 15.5,55.6 15.5,52.4 15.5,51.6 14.9,51 14.8,50.9 13.2,50.9 11.5,50.9 11.1,50.5 11,50.4 11,49.6 11,49.4 11.2,49.2 11.4,49 13.4,49 16.6,49 17.8,50.2 18.1,50.5 22.4,50.5 27,50.5 27.7,51.2 27.7,53.6 27.7,53.8 27.3,54.2 24.6,54.2 20.7,54.2 17.4,57.5 15.1,59.8 12.4,59.8
+VDC on Top Layer "Bottom Layer-No Net" (solid, pour order 4): 11.15,62 11.45,62.3 12.85,62.3 15.05,62.3 23.227,70.477 23.227,71.86 23.667,72.3 26.55,72.3 28.05,72.3 28.45,71.9 28.45,69.3 28.45,56.6 27.35,55.5 21.75,55.5 20.45,55.5 19.15,56.8 15.65,60.3 12.05,60.3 11.45,60.3 11.15,60.6
CS on Bottom Layer "Bottom Layer-No Net" (solid, pour order 8): -15.5,65.3 -15.5,67.9 -15.5,71.2 -15.5,72.9 -14.6,73.8 -14.1,74.3 -10.2,74.3 17.1,74.3 22.4,69 29.5,61.9 29.5,56.8 29.5,47.2 29.5,16.5 27.5,14.5 18.3,14.5 17.8,15 17.7,15.1 17.7,18.6 18.3,19.2 20.7,19.2 24.7,19.2 26,20.5 26.1,20.6 26.1,30.8 26.1,61.7 22.3,65.5 15.7,72.1 -3.2,72.1 -10.1,72.1 -10.5,71.7 -11.8,70.4 -11.8,67.5 -11.8,65.2 -12.2,64.8 -12.3,64.7 -14.9,64.7
+VDC on Bottom Layer "Bottom Layer-No Net" (solid, pour order 6): -23.7,69.8 -23.7,72.4 -23.7,73.5 -23,74.2 -19.2,78 -15.2,78 28.5,78 29.5,77 29.5,70.2 29.5,69.4 28.6,68.5 25,68.5 24.6,68.5 23,70.1 17.9,75.2 8.6,75.2 -15.1,75.2 -17.7,72.6 -17.8,72.5 -17.8,69.7 -17.8,69.6 -18.4,69 -22.9,69 -23.7,69.8

## Keep-outs
Keep-Out Layer:
  the board outline again, w0.203

## Silkscreen, mask and mechanical layers (free items; w line width, h text height)
Top Overlay:
  text "12V" at -80.9,56.3 h1
  text "GND" at -94.8,52.9 h1
  text "5V" at -98.2,52.8 h1
  text "GND" at -80.9,50.2 h1
  text "PB2" at -22.6,-2.5 h1 r90
  text "PB10" at -20,-2.5 h1 r90
Bottom Overlay:
  text "STR5" at 6.5,68.1 h1
  text "STR4" at 6.7,58.6 h1
  text "PWM1" at -11.8,57.4 h1
  text "PWM2" at -11.6,53.2 h1
  text "STR3" at 6.8,44 h1
  text "PWM3" at -11.5,37.2 h1
  text "STR2" at 6.7,32.6 h1
  text "PWM4" at -11.5,27.2 h1
  text "STR1" at 3,13.3 h1
  text "PWM5" at -12.4,8.3 h1
Mechanical 4:
  text "GND" at -91.3,7.9 h1 r90
  text "3V" at -93.8,7.4 h1 r90
  text "VS1" at -55.8,-0.3 h1 r90
  text "CS1" at -58.4,-0.4 h1 r90

## Text inside footprints (layer, text, board x,y; h text height)
C8: Top Overlay "+" at -46.1,64.075 h0.76
KIT1: Top Overlay "PA8" at -33.16,43.95 h1 r90; Top Overlay "PA9" at -35.66,43.95 h1 r90; Top Overlay "GND" at -91.16,43.95 h1 r90; Top Overlay "5V" at -94.16,43.95 h1 r90; Top Overlay "PB9" at -88.66,43.95 h1 r90; Top Overlay "PB8" at -86.16,43.95 h1 r90; Top Overlay "VDD" at -83.66,43.95 h1 r90; Top Overlay "BOOT0" at -81.16,42.95 h1 r90; Top Overlay "PB7" at -78.66,43.95 h1 r90; Top Overlay "PB6" at -76.16,43.95 h1 r90; Top Overlay "PB5" at -73.66,43.95 h1 r90; Top Overlay "PB4" at -71.16,43.95 h1 r90; Top Overlay "PB3" at -68.66,43.95 h1 r90; Top Overlay "PD2" at -66.16,43.95 h1 r90; Top Overlay "PC12" at -63.16,43.95 h1 r90; Top Overlay "PC11" at -60.66,43.95 h1 r90; Top Overlay "PC10" at -58.16,43.95 h1 r90; Top Overlay "PF7" at -50.66,43.95 h1 r90; Top Overlay "PF6" at -48.16,43.95 h1 r90; Top Overlay "PA13" at -45.66,43.95 h1 r90; Top Overlay "PA12" at -43.16,43.95 h1 r90; Top Overlay "PB15" at -20.16,43.95 h1 r90; Top Overlay "PB14" at -17.66,43.95 h1 r90; Top Overlay "PB13" at -15.16,43.95 h1 r90; Top Overlay "GND" at -12.66,-2.55 h1 r90; Top Overlay "PB12" at -15.16,-2.55 h1 r90; Top Overlay "PB11" at -17.6,-2.6 h1 r90; Top Overlay "PB1" at -25.2,-2.5 h1 r90; Top Overlay "PB0" at -27.8,-2.5 h1 r90; Top Overlay "PC5" at -30.3,-2.5 h1 r90; Top Overlay "PC4" at -32.8,-2.5 h1 r90; Top Overlay "3V" at -93.66,-2.55 h1 r90; Top Overlay "GND" at -91.16,-2.55 h1 r90; Top Overlay "VBAT" at -88.66,-2.55 h1 r90; Top Overlay "PC13" at -86.16,-2.55 h1 r90; Top Overlay "PC14" at -83.66,-2.55 h1 r90; Top Overlay "PC15" at -81.16,-2.55 h1 r90; Top Overlay "PF0" at -78.66,-2.55 h1 r90; Top Overlay "PF1" at -76.16,-2.55 h1 r90; Top Overlay "GND" at -73.66,-2.55 h1 r90; Top Overlay "NRST" at -71.16,-2.55 h1 r90; Top Overlay "PC0" at -68.66,-2.55 h1 r90; Top Overlay "PC1" at -66.16,-2.55 h1 r90; Top Overlay "PC2" at -63.16,-2.55 h1 r90; Top Overlay "PC3" at -60.66,-2.55 h1 r90; Top Overlay "PA0" at -58.16,-2.55 h1 r90; Top Overlay "PA1" at -55.66,-2.55 h1 r90; Top Overlay "PA2" at -53.16,-2.55 h1 r90; Top Overlay "PA3" at -50.66,-2.55 h1 r90; Top Overlay "PF4" at -48.1,-2.4 h1 r90; Top Overlay "PF5" at -45.6,-2.5 h1 r90; Top Overlay "PA4" at -42.9,-2.5 h1 r90; Top Overlay "PA5" at -40.1,-2.5 h1 r90; Top Overlay "PA6" at -37.9,-2.5 h1 r90; Top Overlay "PA7" at -35.3,-2.5 h1 r90; Top Overlay "GND" at -12.66,43.95 h1 r90; Top Overlay "PC6" at -22.66,43.95 h1 r90; Top Overlay "PC7" at -25.16,43.95 h1 r90; Top Overlay "PC8" at -27.66,43.95 h1 r90; Top Overlay "PC9" at -30.16,43.95 h1 r90; Top Overlay "PA10" at -38.16,43.95 h1 r90; Top Overlay "PA11" at -40.66,43.95 h1 r90; Top Overlay "PA14" at -53.16,43.95 h1 r90; Top Overlay "PA15" at -55.66,43.95 h1 r90
UR1: Top Overlay "+" at -45.548,77.963 h0.76 r315; Top Overlay "-" at -44.883,82.522 h0.76